# Altium PCB PCB1.PcbDoc (part 2 of 2)
Units mil, origin at the board's own origin, x right, y up, seen from the top; angles counter-clockwise.
Board outline 6000 x 4000 mil, 2 copper layers (Top Layer, Bottom Layer); 71 components, 119 nets, 504 pads, 94 vias.
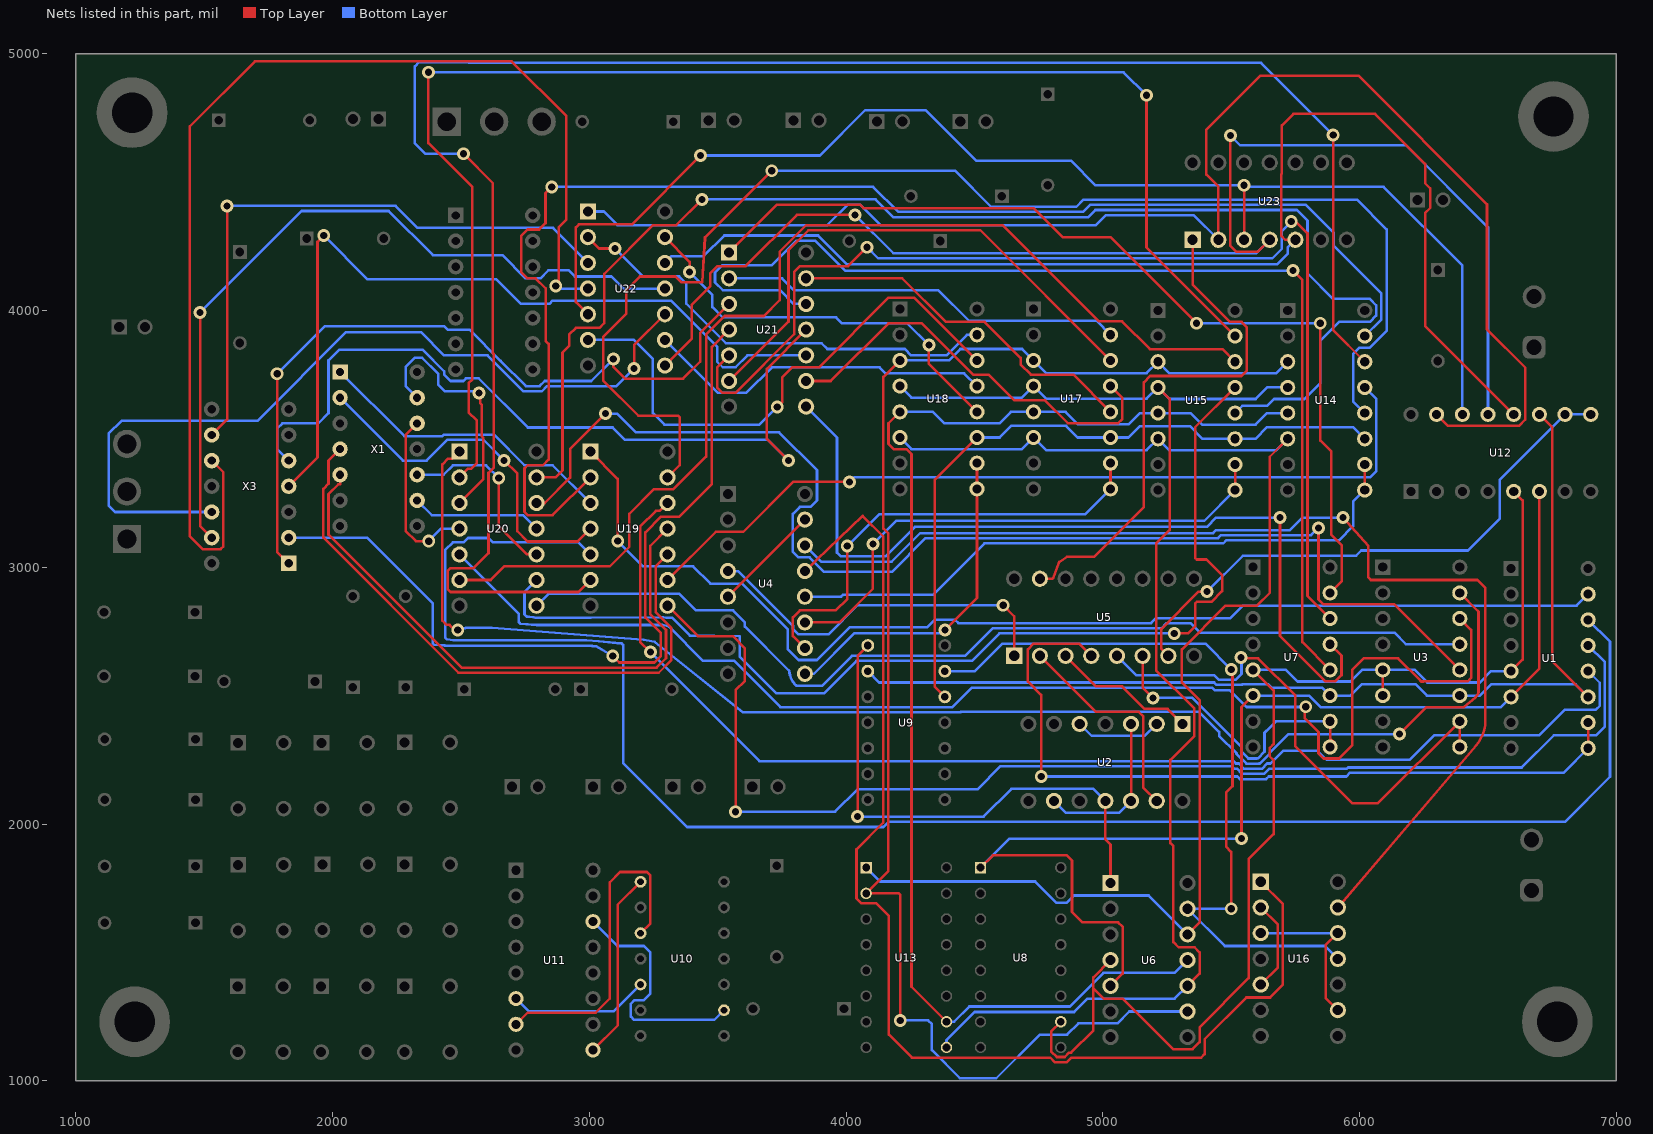
[diagram p2: the nets of this part, all layers, seen from the top]

## Via types
v1: diameter 50, hole 28, Top Layer to Bottom Layer, 94 vias

## Nets (pads, with @x,y where several pads share a name; then routed paths per layer and width w, separated by ;. In a path a pad name is that pad's centre, name@x,y a point inside that pad or via, vN(x,y) a via of type N, cw(c..) or ccw(c..) an arc to the next point about the centre after c; other vN are vias at no path point) (continued)
NetU1_5: U1.5 U3.5 U3.6 U6.4 U7.5 U8.10 U12.5 | length 4699.4
  Top Layer w10: U8.10@4836.3,1230 4799,1192.7 4799,1114.63 4820.87,1092.76 4851.73,1092.76 4868.97,1110 4877,1110 4963,1196 4963,1360 ; U6.4@5030,1470 4963,1403 4963,1360 ; U7.5@5585,2600 5665,2520 5665,2311.57 5650,2296.57 5650,2263.43 5665,2248.43 5665,1960.58 5568,1863.58 5568,1399.71 5376.76,1208.47 5376.76,1151 5349.26,1123.5 5273.5,1123.5 5077,1320 5003,1320 4963,1360 ; U3.6@6090,2500 U3.5@6090,2600 ; U1.5@6590,2595 6635,2640 6635,3260 U12.5@6600,3295
  Bottom Layer w10: U7.5@5585,2600 5713,2600 5758,2555 5965,2555 6010,2600 U3.5@6090,2600 6215,2600 6264,2551 6468,2551 6512,2595 U1.5@6590,2595
NetU1_6: U1.6 U6.5 U7.6 U8.1 U12.6 | length 4579.5
  Top Layer w10: U8.1@4523.7,1830 4571.7,1878 4860,1878 4880,1858 4880,1658 4921,1617 5060,1617 5077,1600 5077,1417 U6.5@5030,1370 ; v1(5540,1943) 5540,2455 U7.6@5585,2500 ; U1.6@6590,2495 6700,2605 U12.6@6700,3295
  Bottom Layer w10: U8.1@4523.7,1830 4636.7,1943 v1(5540,1943) ; U7.6@5585,2500 5803.07,2500 5848.07,2455 6550,2455 U1.6@6590,2495
NetU1_9: U1.9 U1.10 U5.4 | length 3076
  Top Layer w10: v1(4760,2185) 4760,2503 4708,2555 4708,2680 4730,2702 4908,2702 U5.4@4955,2655 ; U1.9@6890,2295 U1.10@6890,2395
  Bottom Layer w10: v1(4760,2185) 5523.89,2185 5533.89,2175 5636.11,2175 5646.11,2185 5948.43,2185 5963.43,2200 6795,2200 U1.9@6890,2295
NetU1_11: U1.11 U3.11 U7.11 U9.2 U12.11 | length 4101.4
  Top Layer w10: U12.11@6700,3595 6750,3545 6750,2635 U1.11@6890,2495
  Bottom Layer w10: U9.2@4085,2595 4129,2551 5433.85,2551 5443.42,2541.43 5541.4,2541.43 5544.49,2544.53 5642.47,2544.53 5656,2531 5854,2531 U7.11@5885,2500 5965,2500 6010,2545 6217,2545 6262,2500 U3.11@6390,2500 6468,2500 6512,2544 6841,2544 U1.11@6890,2495
NetU1_12: U1.12 U19.12 | length 4818.5
  Top Layer w10: v1(3238.27,2669.61) 3198.5,2709.38 3198.5,3157.88 3260,3219.38 3274.38,3219.38 U19.12@3305,3250
  Bottom Layer w10: v1(3238.27,2669.61) 3662.88,2245 5508.76,2245 5518.28,2235.47 5529.99,2235.47 5550.46,2215 5619.54,2215 5640.01,2235.47 5652.89,2235.47 5702.42,2285 5837.03,2285 5872.03,2250 6195,2250 6290,2345 6699,2345 6799,2445 6920,2445 6935,2460 6935,2550 U1.12@6890,2595
NetU1_13: U1.13 U19.8 | length 4910.8
  Top Layer w10: U19.8@3305,2850 3423.5,2731.5 3559.26,2731.5 3606.5,2684.26 3606.5,2557.46 3570,2520.96 v1(3570,2048)
  Bottom Layer w10: v1(3570,2048) 3958,2048 4045,2135 4512,2135 4602,2225 5500.47,2225 5510,2215.47 5521.7,2215.47 5542.18,2195 5627.82,2195 5648.3,2215.47 5950.62,2215.47 5955.15,2220 6631,2220 6756,2345 6920,2345 6955,2380 6955,2630 U1.13@6890,2695
NetU1_14: U1.14 U19.5 | length 6783.8
  Bottom Layer w10: U19.5@3005,3050 2958,3097 2624.79,3097 2608,3113.79 2528,3113.79 2511.21,3097 2469,3097 2440,3068 2440,2725 2445.86,2719.14 2471.43,2715 2988.25,2715 3036.75,2711.24 3126.14,2702.86 3132,2697 3132,2238 3381.66,1988.34 4145.47,1988.34 4165.13,2008 6799,2008 6975,2184 6975,2710 U1.14@6890,2795
NetU1_15: U1.15 U19.1 | length 4525.3
  Top Layer w10: U19.1@3005,3450 3111,3344 v1(3111,3102)
  Bottom Layer w10: v1(3111,3102) 3210,3003 3405,3003 3472,2936 3595,2936 3773.5,2757.5 3773.5,2680 3815,2638.5 3886.5,2638.5 4013.8,2765.81 4315.81,2765.81 4345,2795 4425,2795 4438,2782 5188,2782 5208,2802 5497,2802 5545,2850 6845,2850 U1.15@6890,2895
NetU2_1: U2.1 U5.3 | length 564.8
  Top Layer w10: U5.3@4855,2655 4974,2536 5075,2536 5163,2448 5252,2448 U2.1@5310,2390
NetU2_2: U2.2 U2.5 | length 338.9
  Bottom Layer w10: U2.5@4910,2390 4957,2343 5163,2343 U2.2@5210,2390
NetU2_3: U2.3 U2.9 U2.12 | length 638.9
  Top Layer w10: U2.12@5110,2090 U2.3@5110,2390
  Bottom Layer w10: U2.9@4810,2090 4857,2043 5063,2043 U2.12@5110,2090
NetU2_11: U2.11 U6.1 U9.1 | length 2040.1
  Top Layer w10: v1(4045,2029) 4045,2655 U9.1@4085,2695 ; U2.11@5010,2090 5010,1940 5030,1920 U6.1@5030,1770
  Bottom Layer w10: v1(4045,2029) 4536,2029 4644,2137 4963,2137 U2.11@5010,2090
NetU2_13: U2.13 U5.2 | length 851.3
  Top Layer w10: U5.2@4755,2655 4973,2437 5140,2437 5157,2420 5157,2143 U2.13@5210,2090
NetU3_9: U3.9 U3.10 U5.5 | length 2033.9
  Top Layer w10: v1(5537.58,2648.21) 5540.78,2645 5605,2645 5750,2500 5750,2302.39 5972.39,2080 6070,2080 U3.10@6390,2400 U3.9@6390,2300
  Bottom Layer w10: U5.5@5055,2655 5130,2580 5433.14,2580 5451.71,2561.43 5516.57,2561.43 5540,2584.86 5540,2645.78 v1(5537.58,2648.21)
NetU3_12: U3.12 U20.12 | length 4865.9
  Top Layer w10: U20.12@2795,3250 2827,3250 2926,3349 2926,3460 v1(3064,3598) ; v1(5840,3153) 5840,2875 5860,2855 6135,2855 U3.12@6390,2600
  Bottom Layer w10: v1(3064,3598) 3108.78,3598 3181.78,3525 3740,3525 3887,3378 3887,3260 3862,3235 3820,3235 3793,3208 3793,3060 3815,3038 3858,3038 3914,2982 4178.23,2982 4309.23,3113 5448.94,3113 5460.47,3124.53 5811.53,3124.53 v1(5840,3153)
NetU3_13: U3.13 U20.8 | length 3920.9
  Bottom Layer w10: U20.8@2795,2850 2841.5,2896.5 3351.5,2896.5 3416.5,2831.5 3560,2831.5 3606.5,2784.99 3606.5,2772.64 3606.5,2768.5 3776.34,2598.66 3778.87,2596.12 ; 3778.87,2596.13 ccw(c3867.15,2603.07) 3804.06,2540.94 ccw(c3811.14,2548) 3811.08,2538 3811.14,2538 3906,2538 4023,2655 4464,2655 4571,2762 5228,2762 5248,2782 5342,2782 5379,2745 6135,2745 6180,2700 U3.13@6390,2700
NetU3_14: U3.14 U20.5 | length 5054.9
  Top Layer w10: v1(5790,2456.51) 5786.49,2453 5786.49,2411.51 5840,2358 5840,2275 5860,2255 5920,2255 5971,2306 5971,2600 6016,2645 6150,2645 6237.07,2557.93 6240,2555 6248.28,2555 6411.62,2555.54 6421.09,2555.54 6427.81,2562.26 6434.53,2568.98 6434.53,2755.47 U3.14@6390,2800
  Bottom Layer w10: U20.5@2495,3050 2725.62,2819.38 2725.62,2785.88 2728.55,2782.95 2731.14,2780.37 2795.25,2775 2795.67,2775 3284.6,2775 3308.31,2770.69 3310.52,2768.48 3444,2635 3565,2635 3745,2455 4414,2455 4490,2531 5425.57,2531 5435.14,2521.43 5494.04,2521.43 5560,2455.47 5788.97,2455.47 v1(5790,2456.51)
NetU3_15: U3.15 U20.1 | length 5503.7
  Top Layer w10: v1(2488,2755) 2477.18,2755 2456.86,2775.32 2444.68,2775.32 2428.5,2791.5 2428.5,3400 2450.86,3422.35 2467.35,3422.35 U20.1@2495,3450 ; v1(6155,2350) 6260,2455 6405.86,2455 6450.59,2493.16 ; U3.15@6390,2900 6460.07,2829.93 6463,2827 6463,2514.18 cw(c6426.3,2521.67) 6450.59,2493.16 ; 6463,2514.17 cw(c6426.3,2521.67) 6450.59,2493.16
  Bottom Layer w10: v1(2488,2755) 2495.65,2762.65 2517.22,2762.65 2519.57,2765 2529.26,2765 2620.59,2763.54 2620.9,2763.53 3211.73,2717.74 3212.29,2717.63 3255.07,2709.38 3597.69,2435 4445,2435 4447,2437 5374.72,2437 5453.22,2358.5 5453.22,2343.5 5520.47,2276.24 5520.47,2273.27 5558.74,2235 5608.28,2235 5608.76,2235.47 5611.73,2235.47 5649.53,2273.27 5649.53,2276.24 5723.28,2350 v1(6155,2350)
NetU4_4: U4.4 U5.1 | length 1442.7
  Top Layer w10: v1(4612,2852) 4655,2809 U5.1@4655,2655
  Bottom Layer w10: U4.4@3540,2985 3580,2985 3793.5,2771.5 3793.5,2760 3815,2738.5 3931.5,2738.5 4045,2852 v1(4612,2852)
NetU4_5: U4.5 U4.15 | length 424.3
  Top Layer w10: U4.5@3540,2885 U4.15@3840,3185
NetU4_9: U4.9 U18.9 U18.10 | length 1317.2
  Top Layer w10: v1(4385,2755) 4510,2880 U18.9@4510,3305 U18.10@4510,3405
  Bottom Layer w10: U4.9@3840,2585 3875,2585 4032,2742 4372,2742 v1(4385,2755)
NetU4_10: U4.10 U17.9 U17.10 | length 1803.7
  Top Layer w10: U4.10@3840,2685 3793,2732 3793,2804.5 3820,2831.5 3960,2831.5 4005,2876.5 v1(4005,3082) ; U17.9@5030,3305 U17.10@5030,3405
  Bottom Layer w10: v1(4005,3082) 4129,3206 4931,3206 U17.9@5030,3305
NetU4_11: U4.11 U15.9 U15.10 | length 2090.1
  Top Layer w10: U4.11@3840,2785 3974,2785 4105,2916 v1(4105,3089.83) ; U15.9@5515,3300 U15.10@5515,3400
  Bottom Layer w10: v1(4105,3089.83) 4195.17,3180 5395,3180 U15.9@5515,3300
NetU4_12: U4.12 U14.9 U14.10 | length 2507.8
  Top Layer w10: U14.9@6020,3300 U14.10@6020,3400
  Bottom Layer w10: U4.12@3840,2885 3981,2885 3988,2892 4338,2892 4539,3093 5468.94,3093 5480.47,3104.53 5920,3104.53 5975,3159.53 5975,3255 U14.9@6020,3300
NetU4_13: U4.13 U16.1 | length 4667.9
  Top Layer w10: U4.13@3840,2985 4065,3200 4145,3120 4145,2005 4041,1901 4041,1710 4059,1692 4117,1692 4167,1642 4167,1180 4257,1090 4795.34,1090 4812.59,1072.76 4860.01,1072.76 4877.26,1090 5383.26,1090 5396.76,1103.5 5396.76,1161.76 5559.39,1324.39 5651.39,1324.39 5701.5,1374.5 5701.5,1688.5 U16.1@5615,1775
NetU4_14: U4.14 U16.13 | length 4386.6
  Top Layer w10: U16.13@5915,1675 6452.75,2304.92 6452.88,2305.08 ccw(c6333.97,2406.44) 6488.83,2385.61 6488.83,2920.17 6485.9,2923.1 6459,2950 6044,2950 6034,2960 6034,3082.79 v1(5935,3193)
  Bottom Layer w10: U4.14@3840,3085 3903,3022 4178.16,3022 4289.16,3133 5428.94,3133 5440.47,3144.53 5728.53,3144.53 5777,3193 v1(5935,3193)
NetU5_6: U5.6 U7.9 U7.10 | length 1196.2
  Top Layer w10: U5.6@5155,2655 5155,2531 v1(5195,2491) ; U7.9@5885,2300 5901.9,2316.9 5885,2333.8 U7.10@5885,2400
  Bottom Layer w10: v1(5195,2491) 5349,2491 5477.07,2362.93 5540,2300 5540,2285 5540.47,2284.53 5540.47,2281.56 5567.03,2255 5599.53,2255 5600,2255.47 5603.44,2255.47 5629.53,2281.56 5629.53,2355.47 5634.06,2360 5636.98,2362.93 5674.06,2400 U7.10@5885,2400
NetU5_7: U5.7 U12.9 U12.10 | length 2223.1
  Top Layer w10: U5.7@5255,2655 5228,2682 5228,2760 5373,2905 v1(5406,2905)
  Bottom Layer w10: v1(5406,2905) 5545.53,3044.53 5985.89,3044.53 6006.36,3065 6422,3065 6545,3188 6545,3340 U12.10@6800,3595 U12.9@6900,3595
NetU5_15: U5.15 U23.1 | length 2063.2
  Top Layer w10: U5.15@4755,2955 4803.54,2955 4806.47,2957.93 ccw(c4799.4,2965) 4806.5,2957.96 4828.07,3016.05 4828.83,3018.09 4830.37,3019.64 ; 4830.38,3019.64 4831.01,3020.27 4859.38,3040 4965,3040 5160,3235 5160,3720 5184.53,3744.53 5540,3744.53 5560,3764.53 5560,3935 5540,3955 5495,3955 5350,4100 U23.1@5350,4275
NetU6_9: U6.9 U13.2 U14.3 U15.3 U17.3 U18.3 | length 5771.7
  Top Layer w10: U18.3@4210,3805 4145.47,3740.47 4145.47,3149.83 4165,3130.3 4165,1816.3 U13.2@4078.7,1730 4206,1730 4211,1725 v1(4211,1235)
  Bottom Layer w10: U18.3@4210,3805 4400.94,3805 4445.47,3849.53 4685.47,3849.53 U17.3@4730,3805 4779,3756 5171,3756 U15.3@5215,3800 5260,3755 5675,3755 U14.3@5720,3800 ; v1(4211,1235) 4320,1235 4334,1221 4334,1120 4444,1010 4585,1010 4755,1180 4861,1180 4904.5,1223.5 5056.5,1223.5 5103,1270 U6.9@5330,1270
NetU6_10: U6.10 U13.9 U14.4 U15.4 U17.4 U18.4 | length 5251.2
  Top Layer w10: U15.4@5215,3700 5260,3655 5260,3144 5208,3092 5208,2598 5356.5,2449.5 5356.5,2343.5 5263,2250.01 5263,1926 5275,1914 5275,1540 5295,1520 5357,1520 5377,1500 5377,1417 U6.10@5330,1370
  Bottom Layer w10: U18.4@4210,3705 4255,3660 4685,3660 U17.4@4730,3705 4779,3656 5171,3656 U15.4@5215,3700 5260,3655 5595,3655 5640,3700 U14.4@5720,3700 ; U13.9@4391.3,1130 4391.3,1158.3 4501,1268 4888,1268 4940,1320 5280,1320 U6.10@5330,1370
NetU6_11: U6.11 U13.10 U14.5 U15.5 U17.5 U18.5 | length 5177.2
  Top Layer w10: U18.5@4210,3605 4165.47,3560.47 4165.47,3480 4185.47,3460 4235,3460 4255,3440 4255,1366.3 U13.10@4391.3,1230
  Bottom Layer w10: U18.5@4210,3605 4338,3605 4383,3560 4597,3560 4642,3605 U17.5@4730,3605 4855,3605 4904,3556 5100,3556 5144,3600 U15.5@5215,3600 5342,3600 5387,3555 5595,3555 5640,3600 U14.5@5720,3600 ; U13.10@4391.3,1230 4421.03,1230 4480.42,1289.39 4871.39,1289.39 5002,1420 5280,1420 U6.11@5330,1470
NetU6_12: U6.12 U13.1 U14.6 U15.6 U17.6 U18.6 | length 5226.2
  Top Layer w10: U6.12@5330,1570 5377,1617 5377,2482 5308,2551 5308,2680 5478,2850 5600,2850 5650,2900 5650,3430 U14.6@5720,3500
  Bottom Layer w10: U13.1@4078.7,1830 4132.7,1776 4736.75,1776 4820,1692.75 4858.75,1692.75 4887.65,1721.65 5178.35,1721.65 U6.12@5330,1570 ; U18.6@4210,3505 4255,3460 4685,3460 U17.6@4730,3505 4779,3456 5171,3456 U15.6@5215,3500 5260,3455 5675,3455 U14.6@5720,3500
NetU6_13: U6.13 U9.13 U16.11 | length 2989.2
  Top Layer w10: v1(5500,1670) 5500,1891.66 5480,1911.66 5480,2122.5 5505,2147.5 5505,2596.43 v1(5500,2601.43)
  Bottom Layer w10: U9.13@4385,2595 4502,2595 4609,2702 5400,2702 5500,2602 v1(5500,2601.43) ; v1(5500,1670) U6.13@5330,1670 5475,1525 5865,1525 U16.11@5915,1475
NetU7_12: U7.12 U21.12 | length 4393
  Top Layer w10: v1(5740,4155) 5777,4118 5777,2708 U7.12@5885,2600
  Bottom Layer w10: U21.12@3845,4025 3796.12,4025 3742.62,4078.5 3520,4078.5 3490,4108.5 3490,4147 3518,4175 3710,4175 3806.5,4271.5 3880,4271.5 3996.5,4155 v1(5740,4155)
NetU7_13: U7.13 U21.8 | length 3333.7
  Top Layer w10: v1(5690,3193) 5690,2732 5866.53,2555.47 5905,2555.47 5929.53,2580 5929.53,2655.47 U7.13@5885,2700
  Bottom Layer w10: U21.8@3845,3625 3965,3505 3965,3057 3980,3042 4153.69,3042 4268.69,3157 5405,3157 5441,3193 v1(5690,3193)
NetU7_14: U7.14 U21.5 | length 4502.8
  Top Layer w10: U21.5@3545,3825 3498,3778 3498,3700 3519.5,3678.5 3569.5,3678.5 3798,3907 3798,4150 3820,4172 4008,4172 v1(4082,4246) ; v1(5734,4346) 5751,4346 5797,4300 5797,2888 U7.14@5885,2800
  Bottom Layer w10: v1(4082,4246) 4125,4203 5660,4203 5697,4240 5697,4309 v1(5734,4346)
NetU7_15: U7.15 U21.1 | length 3673.8
  Top Layer w10: U21.1@3545,4225 3732,4412 4054,4412 4068,4398 4731,4398 4845,4284 5031,4284 v1(5365,3950) ; v1(5847,3950) 5847,3493 5890,3450 5890,3126 5930,3086 5930,2945 U7.15@5885,2900
  Bottom Layer w10: v1(5365,3950) v1(5847,3950)
NetU9_12: U9.12 U14.11 U15.11 U17.11 U18.11 | length 2718
  Top Layer w10: U9.12@4385,2495 4345,2535 4345,3340 U18.11@4510,3505
  Bottom Layer w10: U18.11@4510,3505 4598,3505 4643,3550 4857,3550 4902,3505 U17.11@5030,3505 5100,3505 5144,3549 5340,3549 5389,3500 U15.11@5515,3500 5595,3500 5640,3545 5975,3545 U14.11@6020,3500
NetU10_1: U10.1 U11.9 | length 731.6
  Top Layer w10: U11.9@3015,1120 3111.25,1216.25 3111.25,1686.25 U10.1@3200,1775
NetU10_3: U10.3 U11.7 | length 1280.1
  Top Layer w10: U11.7@2715,1220 2760,1265 3025,1265 3080,1320 3080,1773 3120,1813 3225,1813 3238,1800 3238,1613 U10.3@3200,1575
NetU10_5: U10.5 U11.6 | length 548.4
  Bottom Layer w10: U11.6@2715,1320 2764,1271 3096,1271 U10.5@3200,1375
NetU10_9: U10.9 U11.14 | length 959.4
  Bottom Layer w10: U11.14@3015,1620 3110,1525 3213,1525 3238,1500 3238,1340 3211,1313 3175,1313 3162,1300 3162,1250 3175,1237 3487,1237 U10.9@3525,1275
NetU12_12: U12.12 U22.12 U23.5 | length 4884.5
  Top Layer w10: U23.5@5750,4275 5710,4275 5694,4291 5694,4529 5697,4532 5697,4720 5742,4765 6060,4765 6255,4570 6255,4495 6275,4475 6275,4399.42 6255,4379.42 6255,3940 U12.12@6600,3595
  Bottom Layer w10: U22.12@3295,4185 3320.98,4210.98 3445.98,4210.98 3526.5,4291.5 3891.5,4291.5 4003.99,4179 5678.38,4179 5719.38,4220 5719.38,4244.38 U23.5@5750,4275
NetU12_13: U12.13 U22.8 U23.4 | length 5279.9
  Top Layer w10: U22.8@3295,3785 3399.76,3889.76 3399.76,4022.02 3471,4093.26 3471,4144 3499,4172 3608.87,4172 3808.87,4372 v1(4035,4372) ; v1(5497,4681) 5497,4251 5520,4228 5603,4228 U23.4@5650,4275
  Bottom Layer w10: v1(4035,4372) 4184,4223 5598,4223 U23.4@5650,4275 ; v1(5497,4681) 5535,4643 6180,4643 6500,4323 U12.13@6500,3595
NetU12_14: U12.14 U22.5 U23.3 | length 5040.8
  Top Layer w10: U22.5@2995,3985 2948,4032 2948,4323 2960,4335 3166,4335 v1(3434,4603) ; U23.3@5550,4275 v1(5550,4487)
  Bottom Layer w10: v1(3434,4603) 3898,4603 4075,4780 4310,4780 4507,4583 4876,4583 4972,4487 v1(5550,4487) 5556,4481 6093,4481 6400,4174 U12.14@6400,3595
NetU12_15: U12.15 U22.1 U23.2 | length 5708.7
  Top Layer w10: U23.2@5450,4275 5450,4482.5 5403.5,4529 5403.5,4703.5 5614,4914 5995,4914 6496,4413 6496,3926 6645,3777 6645,3575 6620,3550 6345,3550 U12.15@6300,3595
  Bottom Layer w10: U22.1@2995,4385 3057.11,4385 3110.11,4332 3927,4332 4007,4412 4055,4412 4136,4331 4971.66,4331 5011.66,4371 5354,4371 U23.2@5450,4275
NetU14_12: U14.12 U19.13 | length 5193.2
  Top Layer w10: U19.13@3305,3350 3352,3397 3352,3584.14 3346.14,3590 3191,3590 3054,3727 3054,3897 3145,3988 3145,4080 3197,4132 3335.81,4132 3358.81,4109 3440,4109 3451,4284 v1(3711,4544)
  Bottom Layer w10: v1(3711,4544) 4425.01,4544 4565.59,4403.42 4896.51,4403.42 4924.08,4431 5989,4431 6105,4315 6105,3920 6040,3855 6000,3855 5975,3830 5975,3645 U14.12@6020,3600
NetU14_13: U14.13 U19.9 | length 3279.7
  Top Layer w10: U19.9@3305,2950 3493,3138 3600,3138 3794,3332 v1(4014,3332)
  Bottom Layer w10: v1(4014,3332) 4032,3350 6040,3350 6065,3375 6065,3655 U14.13@6020,3700
NetU14_14: U14.14 U19.6 | length 7591.7
  Top Layer w10: v1(2510,4610) 2625,4495 2625,3833.43 2628,3830.43 2628,3387 2608,3367 2608,3054.39 2550.1,2996.5 2460,2996.5 2448.5,2985 2448.5,2915 2460,2903.5 2958.5,2903.5 U19.6@3005,2950 ; v1(5897,4683) 5897,3923 U14.14@6020,3800
  Bottom Layer w10: v1(2510,4610) 2361,4610 2321,4650 2321,4950 2338,4967 2528,4967 2531,4964 5616,4964 v1(5897,4683)
NetU14_15: U14.15 U19.2 | length 5449.4
  Top Layer w10: v1(2854,4481) 2830,4457 2830,4340 2805,4315 2760,4315 2735,4290 2735,4150 2760,4125 2791.24,4125 2830.08,4086.16 2830.08,3881.52 2842,3869.6 2842,3419 2820,3397 2760,3397 2748,3385 2748,3215 2760,3203 2858,3203 U19.2@3005,3350
  Bottom Layer w10: v1(2854,4481) 4106,4481 4203.58,4383.42 4923.42,4383.42 4951,4411 5791,4411 5900,4302 5900,4250.53 6084.53,4066 6084.53,3964.53 U14.15@6020,3900
NetU15_12: U15.12 U20.13 | length 5281.7
  Top Layer w10: U20.13@2795,3350 2869,3350 2896,3377 2896,3835.52 2922,3861.52 2922,3906 2948,3932 3040,3932 3058.63,3950.63 3058.63,4141.63 3249,4332 3339,4332 v1(3439,4432)
  Bottom Layer w10: v1(3439,4432) 4115,4432 4183.58,4363.42 4943.42,4363.42 4971,4391 5755.61,4391 5797,4349.61 5797,4144.53 5897,4044.53 6040,4044.53 6064.53,4020 6064.53,3980 6040,3955.47 5920,3955.47 5847,3882.47 5847,3717 5785,3655 5667,3655 5640,3628 5543,3628 U15.12@5515,3600
NetU15_13: U15.13 U20.9 | length 4181.2
  Top Layer w10: v1(5278,2742) 5332,2742 5357.07,2767.07 5360,2770 5360,2859.14 5365.86,2865 5422.57,2865 5464.26,2906.69 5464.26,2969.15 5403.41,3030 5365.86,3030 5360,3035.86 5360,3545 U15.13@5515,3700
  Bottom Layer w10: U20.9@2795,2950 2748,2903 2748,2816 2756.07,2807.93 2782.6,2805.08 2783.3,2805 ccw(c2795,2850) 2795.18,2803.5 2799.48,2803.52 3005,2803.5 ccw(c3005,2850) 3005.25,2803.5 3282.57,2805 3288.24,2804.95 3300.38,2803.73 ccw(c3305,2850) 3305,2803.5 3322.5,2803.5 3392,2734 3586.5,2731.5 3586.5,2651 3728.5,2509 3915,2509 4041,2635 4490,2635 4597,2742 v1(5278,2742)
NetU15_14: U15.14 U20.6 | length 4277.2
  Top Layer w10: U20.6@2495,2950 2616,2950 2669,3003 3080,3003 3156,3079 3156,3208 3251,3303 3327,3303 3455,3431 3455,3906 3527,3978 3680,3978 3742,4040 3742,4228.85 3845.15,4332 4610,4332 4985,3957 5075,3957 5183,3849 5466,3849 U15.14@5515,3800
NetU15_15: U15.15 U20.2 | length 5615.1
  Top Layer w10: v1(2374,4927) 2374,4651 2545,4480 2545,3731.02 2530.72,3716.74 2530.72,3603.21 2561.5,3572.43 2561.5,3404.01 2540.99,3383.5 2528.5,3383.5 U20.2@2495,3350 ; v1(5170,4838) 5170,4245 U15.15@5515,3900
  Bottom Layer w10: v1(2374,4927) 5081,4927 v1(5170,4838)
NetU16_2: U16.2 U16.5 | length 355.1
  Top Layer w10: U16.5@5615,1375 5681.5,1441.5 5681.5,1608.5 U16.2@5615,1675
NetU16_3: U16.3 U16.9 U16.12 | length 638.9
  Top Layer w10: U16.9@5915,1275 5868,1322 5868,1528 U16.12@5915,1575
  Bottom Layer w10: U16.3@5615,1575 U16.12@5915,1575
NetU17_12: U17.12 U21.13 | length 1415.3
  Top Layer w10: U21.13@3845,4125 4219.06,4125 4389.06,3955 4540,3955 4680,3815 4680,3789.53 4720,3749.53 4885.47,3749.53 U17.12@5030,3605
NetU17_13: U17.13 U21.9 | length 1638.5
  Top Layer w10: U21.9@3845,3725 3940.47,3725 4165,3949.53 4295.47,3949.53 4495,3750 4555,3750 4655.47,3649.53 4775,3649.53 4864.06,3560.47 5060,3560.47 5075,3575.47 5075,3660 U17.13@5030,3705
NetU17_14: U17.14 U21.6 | length 2101.3
  Top Layer w10: U21.6@3545,3725 3776,3956 3776,4234.57 3853.43,4312 4523,4312 U17.14@5030,3805
NetU17_15: U17.15 U21.2 | length 1576.1
  Bottom Layer w10: U21.2@3545,4125 3751,4125 3798,4078 4360,4078 4478,3960 4975,3960 U17.15@5030,3905
NetU18_12: U18.12 U22.13 | length 1590.4
  Top Layer w10: U22.13@3295,4285 3391,4189 v1(3391,4149) ; v1(4323,3865) 4323,3792 U18.12@4510,3605
  Bottom Layer w10: v1(3391,4149) 3480,4060 3480,4013 3520,3973 3961,3973 3984.47,3949.53 4238.47,3949.53 v1(4323,3865)
NetU18_13: U18.13 U22.9 | length 1372
  Bottom Layer w10: U22.9@3295,3885 3501.5,3678.5 3611.5,3678.5 3710.99,3778 4131,3778 4154,3755 4460,3755 U18.13@4510,3705
NetU18_14: U18.14 U22.6 | length 2137.7
  Top Layer w10: v1(3732,3624) 3752,3644 3752,3740 3790,3778 3894.47,3778 4166,4049.53 4265.47,4049.53 U18.14@4510,3805
  Bottom Layer w10: U22.6@2995,3885 3174,3885 3248,3811 3248,3600 3293,3555 3663,3555 v1(3732,3624)
NetU18_15: U18.15 U22.2 | length 1784.2
  Top Layer w10: U22.2@2995,4285 3039,4241 v1(3101,4241)
  Bottom Layer w10: v1(3101,4241) 3210,4132 3350,4132 3378,4104 3378,4026.24 3532.24,3872 3905,3872 3927.47,3849.53 4229.47,3849.53 4254,3825 4391,3825 4471,3905 U18.15@4510,3905
NetU19_3: U19.3 X1.1 | length 1191.6
  Bottom Layer w10: X1.1@2030,3760 2280,3510 2428.5,3510 2435,3516.5 2628.47,3516.5 2747.97,3397 2858,3397 U19.3@3005,3250
NetU19_4: U19.4 X1.2 | length 1426.4
  Top Layer w10: v1(2668,3416) 2720,3364 2720,3140 2760,3100 2955,3100 U19.4@3005,3150
  Bottom Layer w10: X1.2@2030,3660 2275,3415 2366.5,3415 2448,3496.5 2587.5,3496.5 v1(2668,3416)
NetU19_10: U19.10 X1.4 | length 2420.9
  Top Layer w10: X1.4@2030,3460 1985,3415 1985,3325 1965,3305 1965,3115 2491,2589 3270.8,2589 3319,2637.2 3319,2764.5 3258.5,2825 3258.5,3003.5 U19.10@3305,3050
NetU19_11: U19.11 X1.5 | length 2356.5
  Top Layer w10: X1.5@2030,3360 2030,3323 2023,3323 1985,3285 1985,3127 2503,2609 3262.52,2609 3299,2645.48 3299,2756 3238.5,2816.5 3238.5,3083.5 U19.11@3305,3150
NetU20_3: U20.3 X1.13 | length 994.1
  Top Layer w10: U20.3@2495,3250 2588,3343 2588,3503.8 2581.5,3510.31 2581.5,3632.72 2576.5,3637.72 2576.5,3671.94 v1(2570.72,3677.72)
  Bottom Layer w10: X1.13@2330,3660 2285,3705 2285,3780 2320,3815 2350,3815 2411.43,3753.57 2411.43,3710.86 2437.07,3685.22 2563.22,3685.22 v1(2570.72,3677.72)
NetU20_4: U20.4 X1.12 | length 684
  Top Layer w10: X1.12@2330,3560 2285,3515 2285,3141.36 2325,3101.36 v1(2375,3101.36)
  Bottom Layer w10: v1(2375,3101.36) 2423.64,3150 U20.4@2495,3150
NetU20_10: U20.10 X1.10 | length 733.8
  Top Layer w10: v1(2648,3347) 2648,3159 2757,3050 U20.10@2795,3050
  Bottom Layer w10: X1.10@2330,3360 2433,3360 2469.5,3396.5 2598.5,3396.5 v1(2648,3347)
NetU20_11: U20.11 X1.9 | length 510.6
  Bottom Layer w10: X1.9@2330,3260 2387,3203 2742,3203 U20.11@2795,3150
NetU21_3: U21.3 X3.1 | length 2971
  Top Layer w10: v1(1785,3753) 1785,3060 X3.1@1830,3015 ; v1(3094,3811) 3094,3779.92 3140,3733.92 3365.92,3733.92 3432,3800 3432,3912 U21.3@3545,4025
  Bottom Layer w10: v1(1785,3753) 1971,3939 2435,3939 2449,3925 2533.43,3925 2655,3803.43 2655,3803.08 2753.08,3705 2806.92,3705 2826.92,3725 3008,3725 v1(3094,3811)
NetU21_4: U21.4 X3.2 | length 3217.4
  Top Layer w10: v1(3092,2654) 3117,2629 3254.23,2629 3279,2653.77 3279,2743.01 3218.5,2803.5 3218.5,3135.5 3280,3197 3351,3197 3478,3324 3478,3858 U21.4@3545,3925
  Bottom Layer w10: X3.2@1830,3115 2135,3115 2390,2860 2390,2704 2396.07,2697.93 2437.57,2695 3011.55,2693.13 3027.83,2691.87 v1(3092,2654)
NetU21_10: U21.10 X3.4 | length 3187.6
  Top Layer w10: X3.4@1830,3315 1942,3427 1942,4266.5 v1(1966.5,4291)
  Bottom Layer w10: v1(1966.5,4291) 2135.5,4122 2638,4122 2735,4025 2845,4025 2858,4038 3319.01,4038 3498.5,3858.5 3498.5,3800 3520,3778.5 3570,3778.5 3616.5,3825 U21.10@3845,3825
NetU21_11: U21.11 X3.5 | length 3184.1
  Top Layer w10: v1(3776,3415) 3692,3499 3692,3772 U21.11@3845,3925
  Bottom Layer w10: X3.5@1830,3415 1785,3460 1785,3540 1805,3560 1945,3560 1985,3600 1985,3805 2026,3846 2352,3846 2435,3763 2435,3750 2460,3725 2510,3725 2520,3735 2570,3735 2761,3544 3091,3544 3138,3497 3694,3497 v1(3776,3415)
NetU22_3: U22.3 X3.9 | length 2413.8
  Top Layer w10: X3.9@1530,3515 1590,3575 v1(1590,4407)
  Bottom Layer w10: v1(1590,4407) 2246,4407 2332,4321 2859,4321 U22.3@2995,4185
NetU22_4: U22.4 X3.10 | length 4571.8
  Top Layer w10: X3.10@1530,3415 1575,3370 1575,3080 1565,3070 1495,3070 1445,3120 1445,4717 1698,4970 2698,4970 2910,4758 2910,4352.07 2882,4324.07 2882,4107 v1(2870,4095)
  Bottom Layer w10: v1(2870,4095) 2880,4085 U22.4@2995,4085
NetU22_10: U22.10 X3.12 | length 3293.8
  Top Layer w10: v1(3174.92,3773.92) 3174.92,3864.92 U22.10@3295,3985
  Bottom Layer w10: X3.12@1530,3215 1154,3215 1129,3240 1129,3520 1179,3570 1708,3570 2053,3915 2345,3915 2435,3825 2604.79,3825 2744.79,3685 2815.21,3685 2835.21,3705 3106,3705 v1(3174.92,3773.92)
NetU22_11: U22.11 X3.13 | length 3019.7
  Top Layer w10: v1(1485,3992) 1485,3160 X3.13@1530,3115
  Bottom Layer w10: v1(1485,3992) 1880,4387 2219,4387 2391,4215 2662,4215 2752,4125 2810,4125 2840.65,4155.65 2920.59,4155.65 2944.24,4132 3087,4132 3134,4085 U22.11@3295,4085
pads on no net: SW1.A' SW1.B SW2.A' SW2.B SW3.A' SW3.B SW4.A' SW4.B SW5.A' SW5.B SW6.A' SW6.B SW7.A' SW7.B SW8.A' SW8.B SW9.A' SW9.B U1.2 U1.7 U3.2 U3.7 U4.6 U4.7 U5.9 U5.10 U5.13 U6.6 U6.8 U7.2 U7.7 U8.13 U9.3 U9.4 U9.5 U9.6 U9.8 U9.9 U9.10 U9.11 U10.12 U10.13 U11.15 U12.2 U12.7 U13.13 U14.1 U14.2 U14.7 U15.1 U15.2 U15.7 U17.1 U17.2 U17.7 U18.1 U18.2 U18.7 U23.6 U23.8 U23.9 U23.10 U23.11 U23.12 U23.13 X1.3 X1.11 X2.3 X2.8 X2.9 X2.10 X2.11 X2.12 X2.13 X3.3 X3.11

## Polygon pours and split planes (outlines as drawn)
GND on Top Layer "GND_L01_P000" (solid, remove dead copper, pour order 0): 1000,5000 7005,5000 7005,1000 6995,990 1000,990
GND on Bottom Layer "GND_L02_P001" (solid, remove dead copper, pour order 1): 995,5000 1000,5005 7000,5005 7000,995 6995,990 995,990

## Silkscreen, mask and mechanical layers (free items; w line width, h text height)
Bottom Overlay:
  text "C-10" at 6370,1225 h200 r270
  text "212, 246, 249" at 6229.99,1175 h60 r270

## Text inside footprints (layer, text, board x,y; h text height)
U9: Top Overlay "REFDES" at 4147.5,2370 h50; Top Overlay "RefDes" at 4160,2370 h50; Top Overlay "*" at 4072.5,2725 h50; Mechanical 13 "RefDes2" at 4147.5,2370 h50; Mechanical 13 "*" at 4106.5,2670 h50
U10: Top Overlay "*" at 3187.5,1803 h50; Mechanical 13 "*" at 3235,1750 h50
X1: Top Overlay "*" at 2017.5,3795 h50; Mechanical 13 "*" at 2067.5,3735 h50
X2: Top Overlay "*" at 2467.5,4405 h50; Mechanical 13 "*" at 2517.5,4345 h50
X3: Top Overlay "*" at 1842.5,2980 h50 r180; Mechanical 13 "*" at 1792.5,3040 h50 r180